# Altium PCB servoUSBrev0.pcbdoc
Units mm, origin at the board's own origin, x right, y up, seen from the top; angles counter-clockwise.
Board outline 50.8 x 23.11 mm, 2 copper layers (Top Layer, Bottom Layer); 15 components, 23 nets, 84 pads, 10 vias.
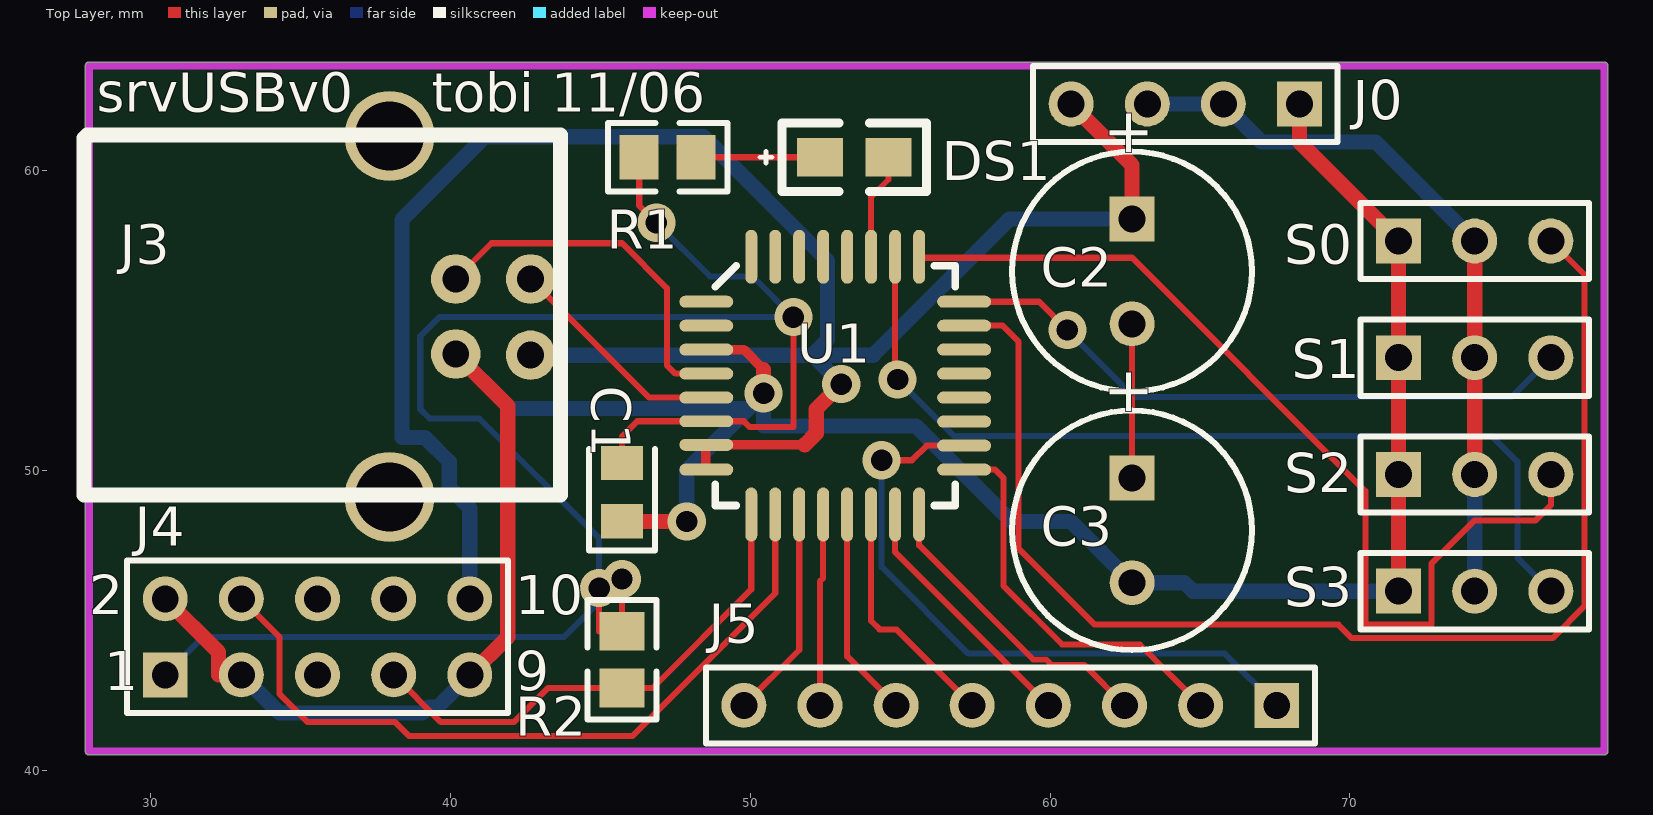
[diagram p0: Top Layer view]
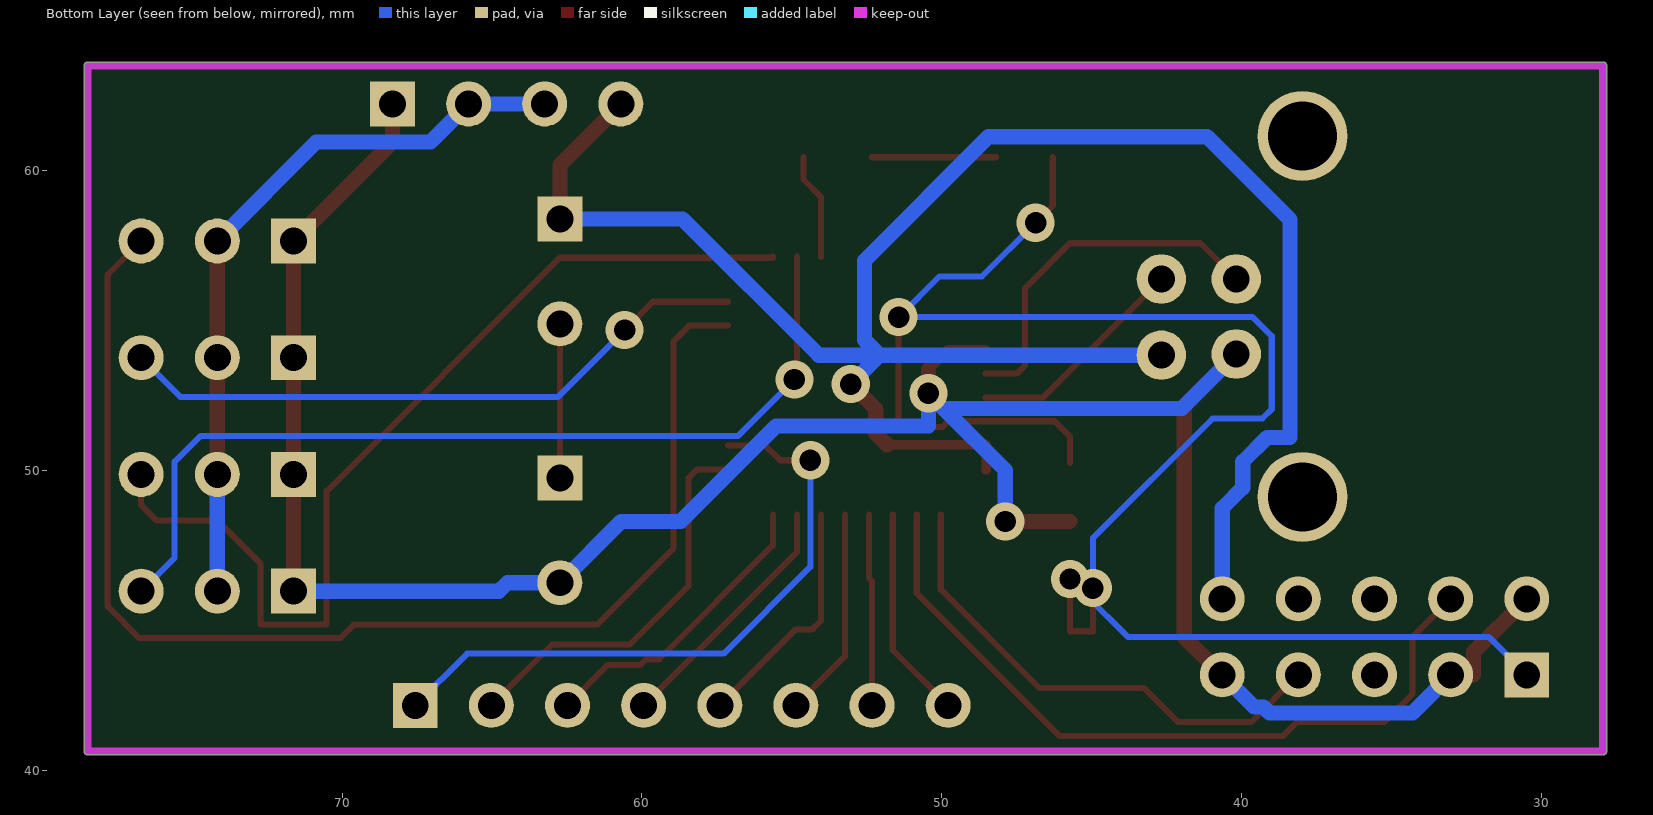
[diagram p1: Bottom Layer view, seen from below]

## Layer stack, top to bottom
Top Layer: signal copper 0.0356
Dielectric: dielectric 0.32, FR-4, Dk 4.8
Bottom Layer: signal copper 0.0356

## Board outline
27.94,40.513 cw(c27.94,40.64) 27.813,40.64 27.813,63.5 cw(c27.94,63.5) 27.94,63.627 78.486,63.627 cw(c78.486,63.5) 78.613,63.5 78.613,40.64 cw(c78.486,40.64) 78.486,40.513

## Design rules (kind name [scope] priority, off if disabled: settings)
Clearance [All] p1: gap=0.254
ComponentClearance [All] p1: gap=0.254 collisioncheckmode=0
PolygonConnect [All] p1: connectstyle=Relief reliefconductorwidth=0.254 reliefentries=4 polygonreliefangle="90 Angle"
RoomDefinition servoUSBrev0 [InComponentClass('servoUSBrev0')] p1: confinementstyle=ConfineIn formatcopy=TRUE outline 26.924,40.132 79.502,40.132 79.502,64.77 26.416,64.77 26.416,64.516
RoutingVias [All] p1: holewidth=0.711 width=1.27 viastyle="Through Hole" minholewidth=0.711 minwidth=1.27 maxholewidth=0.711 maxwidth=1.27
SMDNeckDown [All] p1: percent=80.000
SolderMaskExpansion [All] p1: expansion=0.102
TestPointUsage [All] p1: valid=0 allowmultiple=FALSE
Testpoint [All] p1: side=15 testpointundercomponent=TRUE minsize=1.016 maxsize=2.54 preferedsize=1.524 minholesize=0 maxholesize=1.016 preferedholesize=0.813 testpointgrid=0.025 style=1023 order=-539222988
Width "Schematic Width Constraint" [InNet('VBUS')] p1: maxlimit=1.524 minlimit=0.254 preferedwidth=0.508
Width "Schematic Width Constraint_2" [InNet('SPOW')] p2: maxlimit=1.524 minlimit=0.254 preferedwidth=0.508
Width "Schematic Width Constraint_1" [InNet('GND')] p3: maxlimit=1.524 minlimit=0.254 preferedwidth=0.508
Width [All] p4: maxlimit=0.254 minlimit=0.203 preferedwidth=0.254 toplayer_maxwidth=0.203 toplayer_prefwidth=0.203 bottomlayer_maxwidth=0.203 bottomlayer_prefwidth=0.203 minimp=50.000000 maximp=50.000000 favimp=50.000000
17 further rules are at their usual default settings.

## Components (designator, comment, footprint, x,y, rotation, side; value= is the part's Value field where it differs from the comment)
C1 "100nF" CC2013-0805 45.72,49.276 r90 top
C2 "B0810-2R5105 Aerogel PowerStor (solarbotics.com)" CAPPR3.5-8X10.5 62.738,56.642 r270 top
C3 "B0810-2R5105 Aerogel PowerStor (solarbotics.com)" CAPPR3.5-8X10.5 62.738,48.006 r270 top
DS1 "LED" 0805LED 52.324,60.452 r0 top
J0 "Bat/VBUS" HDR1X4 68.326,62.23 r180 top
J3 "USB B" usb 42.672,56.388 r270 top
J4 "Debug" HDR2X5 30.48,43.18 r0 top
J5 "Port2" HDR1X8 67.564,42.164 r180 top
R1 "470" CR2012-0805 47.244,60.452 r0 top
R2 "1k" CR2012-0805 45.72,43.688 r270 top
S0 "S0" HDR1X3 71.628,57.658 r0 top
S1 "S1" HDR1X3 71.628,53.763 r0 top
S2 "S2" HDR1X3 71.628,49.869 r0 top
S3 "S3" HDR1X3 71.628,45.974 r0 top
U1 "C8051F320" TQFP32 52.832,52.832 r0 top

## Footprints (in the part's own frame and the unit in brackets; to place one, negate y for a bottom-side part, rotate by r counter-clockwise, add the part's x,y. Pads: shape width x height; smd on the part's side, far side on the other; paste and mask are expansions set on the pad)
0805LED [mil]
  rect 60x50 smd: +(0,0) -(90,0)
  silkscreen extent -79,-45 140,45
CAPPR3.5-8X10.5 [mm]
  rect 1.5x1.5 hole 0.9: 1(-1.75,0)
  round 1.5 hole 0.9: 2(1.75,0)
  silkscreen extent -4,-4 4,4
CC2013-0805 [mm]
  rect 1.15x1.4 smd: 1(-0.975,0) 2(0.975,0)
  silkscreen extent -1.95,-1.1 1.45,1.1
CR2012-0805 [mm]
  rect 1.3x1.5 smd: 1(-0.95,0) 2(0.95,0)
  silkscreen extent -2,-1.15 2,1.15
HDR1X3 [mm] "Connector; Header; 3 Position"
  rect 1.5x1.5 hole 0.9: 1(0,0)
  round 1.5 hole 0.9: 2(2.54,0) 3(5.08,0)
  silkscreen extent -1.27,-1.27 6.35,1.27
HDR1X4 [mm] "Connector; Header; 4 Position"
  rect 1.5x1.5 hole 0.9: 1(0,0)
  round 1.5 hole 0.9: 2(2.54,0) 3(5.08,0) 4(7.62,0)
  silkscreen extent -1.27,-1.27 8.89,1.27
HDR1X8 [mm] "Connector; Header; 8 Position"
  rect 1.5x1.5 hole 0.9: 1(0,0)
  round 1.5 hole 0.9: 2(2.54,0) 3(5.08,0) 4(7.62,0) 5(10.16,0) 6(12.7,0) 7(15.24,0) 8(17.78,0)
  silkscreen extent -1.27,-1.27 19.05,1.27
HDR2X5 [mm] "Connector; Header; 5x2 Position"
  rect 1.5x1.5 hole 0.9: 1(0,0)
  round 1.5 hole 0.9: 2(0,2.54) 3(2.54,0) 4(2.54,2.54) 5(5.08,0) 6(5.08,2.54) 7(7.62,0) 8(7.62,2.54) 9(10.16,0) 10(10.16,2.54)
  silkscreen extent -1.27,-1.27 11.43,3.81
TQFP32 [mm]
  oval 1.8x0.4 smd: 1(-4.3,2.8) 2(-4.3,2) 3(-4.3,1.2) 4(-4.3,0.4) 5(-4.3,-0.4) 6(-4.3,-1.188) 7(-4.3,-1.975) 8(-4.3,-2.8) 17(4.3,-2.8) 18(4.3,-2) 19(4.3,-1.2) 20(4.3,-0.4) 21(4.3,0.4) 22(4.3,1.2) 23(4.3,2) 24(4.3,2.8)
  oval 0.4x1.8 smd: 9(-2.8,-4.3) 10(-2,-4.3) 11(-1.2,-4.3) 12(-0.4,-4.3) 13(0.4,-4.3) 14(1.2,-4.3) 15(2,-4.3) 16(2.8,-4.3) 25(2.8,4.3) 26(2,4.3) 27(1.2,4.3) 28(0.4,4.3) 29(-0.4,4.3) 30(-1.2,4.3) 31(-2,4.3) 32(-2.8,4.3)
  silkscreen extent -4,-4 4,4
usb [mm]
  round 1.651 hole 0.9: 1(2.54,0) 2(0,0) 3(0,-2.5) 4(2.5,-2.5)
  round 3 hole 2.3: 5(-4.77,-4.71) 5(7.27,-4.71)
  silkscreen extent -4.8,-14.9 7.2,1

## Part data
C1: library part CAPCHIP
C2 C3: library part "Cap Pol1", "Polarized Capacitor (Radial)"
DS1: "LED, SMT 3mm by 1.5mm"
J0: library part "Header 4", "Header, 4-Pin"
J3: library part USB, "USB TypB"
J4: library part "Header 5X2", "Header, 5-Pin, Dual row"
J5: library part "Header 8", "Header, 8-Pin"
R1 R2: library part RES1
S0 S1 S2 S3: library part "Header 3", "Header, 3-Pin"
U1: "Silicon Labs USB Microcontroller"

## Via types
v1: diameter 1.27, hole 0.711, Top Layer to Bottom Layer, 10 vias

## Nets (pads, with @x,y where several pads share a name; then routed paths per layer and width w, separated by ;. In a path a pad name is that pad's centre, name@x,y a point inside that pad or via, vN(x,y) a via of type N, cw(c..) or ccw(c..) an arc to the next point about the centre after c; other vN are vias at no path point)
/RST/C2CK: J4.7 R2.2 U1.9 | length 16.9
  Top Layer w0.203: J4.7 39.675,41.605 42.113,41.605 43.246,42.738 R2.2 46.736,42.738 50.032,46.034 U1.9
C2D: J4.4 U1.10 | length 25.4
  Top Layer w0.203: J4.4 34.29,44.45 34.29,42.545 35.23,41.605 38.151,41.605 38.608,41.148 46.076,41.148 50.832,45.904 U1.10
D+: J3.3 U1.4 | length 12.2
  Top Layer w0.203: J3.3 41.366,57.582 45.72,57.582 47.219,56.083 47.219,53.511 47.498,53.232 U1.4
D-: J3.2 U1.5 | length 7.5
  Top Layer w0.203: J3.2 46.628,52.432 U1.5
GND: C1.1 C3.2 J0.1 J3.4 J4.2 J4.3 J4.9 S0.1 S1.1 S2.1 S3.1 U1.3 | length 87.8
  Top Layer w0.32: U1.3 49.784,54.032 50.444,53.372
  Top Layer w0.508: J4.2 32.258,43.942 32.258,43.18 J4.3 ; J3.4 41.91,52.15 41.91,44.45 J4.9 ; C1.1 v1(47.879,48.301) ; v1(50.444,52.578) 50.444,53.372 ; J0.1 68.326,60.96 S0.1 S1.1 S2.1 S3.1
  Bottom Layer w0.508: J4.3 34.29,41.91 39.065,41.91 39.268,42.113 39.573,42.113 J4.9 ; J3.4 41.99,52.07 49.936,52.07 ; v1(47.879,48.301) 47.879,50.013 49.936,52.07 ; S3.1 64.77,45.974 64.488,46.256 C3.2 60.693,48.301 58.709,48.301 55.524,51.486 50.444,51.486 v1(50.444,52.578) 49.936,52.07
LED+: DS1.+ R1.2 | length 4.1
  Top Layer w0.203: R1.2 DS1.+
LED-: DS1.- U1.27 | length 3.6
  Top Layer w0.203: U1.27 54.032,59.131 54.61,59.709 DS1.-
NetC2_2: C2.2 C3.1 | length 5.1
  Top Layer w0.203: C3.1 C2.2
P20: J5.1 U1.18 | length 21.6
  Top Layer w0.203: v1(54.381,50.343) 55.391,50.343 55.88,50.832 U1.18
  Bottom Layer w0.203: v1(54.381,50.343) 54.381,46.787 57.277,43.891 65.837,43.891 J5.1
P21: J5.2 U1.17 | length 13.3
  Top Layer w0.203: U1.17 58.166,50.032 58.445,49.753 58.445,46.152 60.401,44.196 62.992,44.196 J5.2
P22: J5.3 U1.16 | length 10.1
  Top Layer w0.203: U1.16 55.632,47.5 59.436,43.696 59.866,43.696 60.048,43.514 61.134,43.514 J5.3
P23: J5.4 U1.15 | length 8.5
  Top Layer w0.203: U1.15 54.832,47.276 J5.4
P24: J5.5 U1.14 | length 8.1
  Top Layer w0.203: U1.14 54.032,44.98 54.313,44.699 54.869,44.699 J5.5
P25: J5.6 U1.13 | length 7
  Top Layer w0.203: U1.13 53.232,43.796 J5.6
P26: J5.7 U1.12 | length 6.4
  Top Layer w0.203: J5.7 52.324,46.304 52.432,46.412 U1.12
P27: J5.8 U1.11 | length 7.1
  Top Layer w0.203: J5.8 51.632,44.012 U1.11
S0: S3.3 U1.26 | length 30.7
  Top Layer w0.203: U1.26 54.832,53.118 v1(54.915,53.035)
  Bottom Layer w0.203: v1(54.915,53.035) 56.794,51.156 74.727,51.156 75.59,50.292 75.59,47.092 S3.3
S1: S2.3 U1.25 | length 32.6
  Top Layer w0.203: U1.25 55.632,57.099 62.738,57.099 70.522,49.315 70.522,44.868 72.734,44.868 72.734,46.902 74.168,48.336 76.2,48.336 76.708,48.844 S2.3
S2: S1.3 U1.24 | length 21.4
  Top Layer w0.203: U1.24 59.633,55.632 v1(60.579,54.686)
  Bottom Layer w0.203: v1(60.579,54.686) 62.814,52.451 75.396,52.451 S1.3
S3: S0.3 U1.23 | length 42.1
  Top Layer w0.203: U1.23 58.42,54.832 58.953,54.299 58.953,47.396 61.493,44.856 69.62,44.856 70.065,44.411 76.771,44.411 77.826,45.466 77.826,56.54 S0.3
SPOW: J0.2 J0.3 S0.2 S1.2 S2.2 S3.2 | length 24.5
  Top Layer w0.508: S2.2 S1.2 S0.2
  Bottom Layer w0.508: J0.3 J0.2 67.056,60.96 70.866,60.96 S0.2 ; S3.2 S2.2
VBUS: C2.1 J0.4 J3.1 J4.10 U1.7 U1.8 | length 69.1
  Top Layer w0.32: U1.8 48.514,50.032 48.514,50.857 U1.7 51.816,50.857
  Top Layer w0.508: 51.816,50.857 52.197,51.238 52.197,52.045 v1(53.035,52.883) ; J0.4 62.738,60.198 C2.1
  Bottom Layer w0.508: J4.10 40.64,48.743 39.954,49.428 39.954,50.292 39.141,51.105 38.379,51.105 38.379,58.369 41.148,61.138 48.438,61.138 52.578,56.998 52.578,54.356 52.07,53.848 ; J3.1 52.07,53.848 ; v1(53.035,52.883) 52.07,53.848 ; C2.1 58.646,58.392 54.102,53.848 52.07,53.848
VDD: C1.2 J4.1 R1.1 R2.1 U1.6 | length 63.9
  Top Layer w0.203: v1(44.958,46.076) 44.958,44.638 R2.1 v1(45.72,46.38) ; C1.2 45.72,51.136 46.228,51.644 U1.6 49.784,51.644 49.98,51.448 51.435,51.448 v1(51.435,55.118) ; R1.1 46.294,58.837 v1(46.863,58.268)
  Bottom Layer w0.203: J4.1 31.75,44.45 43.79,44.45 45.187,45.847 v1(45.72,46.38) ; v1(44.958,46.076) 44.958,47.74 40.962,51.736 39.298,51.736 38.989,52.045 38.989,54.483 39.624,55.118 v1(51.435,55.118) 50.08,56.473 48.657,56.473 v1(46.863,58.268)
pads on no net: J3.5 J4.5 J4.6 J4.8 U1.1 U1.2 U1.19 U1.20 U1.21 U1.22 U1.28 U1.29 U1.30 U1.31 U1.32

## Keep-outs
Keep-Out Layer:
  lines w0.254: 27.94,40.64 27.94,63.5 78.486,63.5 78.486,40.64 27.94,40.64

## Other copper
Top Layer:
  text "note servo labels flipped" at 81.788,41.91 h1.52 r90

## Silkscreen, mask and mechanical layers (free items; w line width, h text height)
Top Overlay:
  text "srvUSBv0" at 28.194,61.976 h1.3
  text "tobi 11/06" at 39.37,61.976 h1.3
Drill Drawing:
  text ".LEGEND" at 77.216,25.654 h1.3
  text "Drill Drawing." at 77.47,20.574 h1.3

## Dimensions
27.94,40.64 to 27.94,63.5 on Mechanical 1
27.94,40.64 to 78.486,40.64 on Mechanical 1

## Text inside footprints (layer, text, board x,y; h text height)
C2: Top Overlay "+" at 61.988,62.117 h1.5 r270
C3: Top Overlay "+" at 61.988,53.481 h1.5 r270
J4: Top Overlay "10" at 42.164,45.212 h1.3; Top Overlay "9" at 42.164,42.672 h1.3; Top Overlay "1" at 28.448,42.672 h1.3; Top Overlay "2" at 27.94,45.212 h1.3